# Altium PCB Anchor.PcbDoc
Units mm, origin at the board's own origin, x right, y up, seen from the top; angles counter-clockwise.
Board outline 69.08 x 70.38 mm, 2 copper layers (Top Layer, Bottom Layer); 37 components, 23 nets, 165 pads, 47 vias.
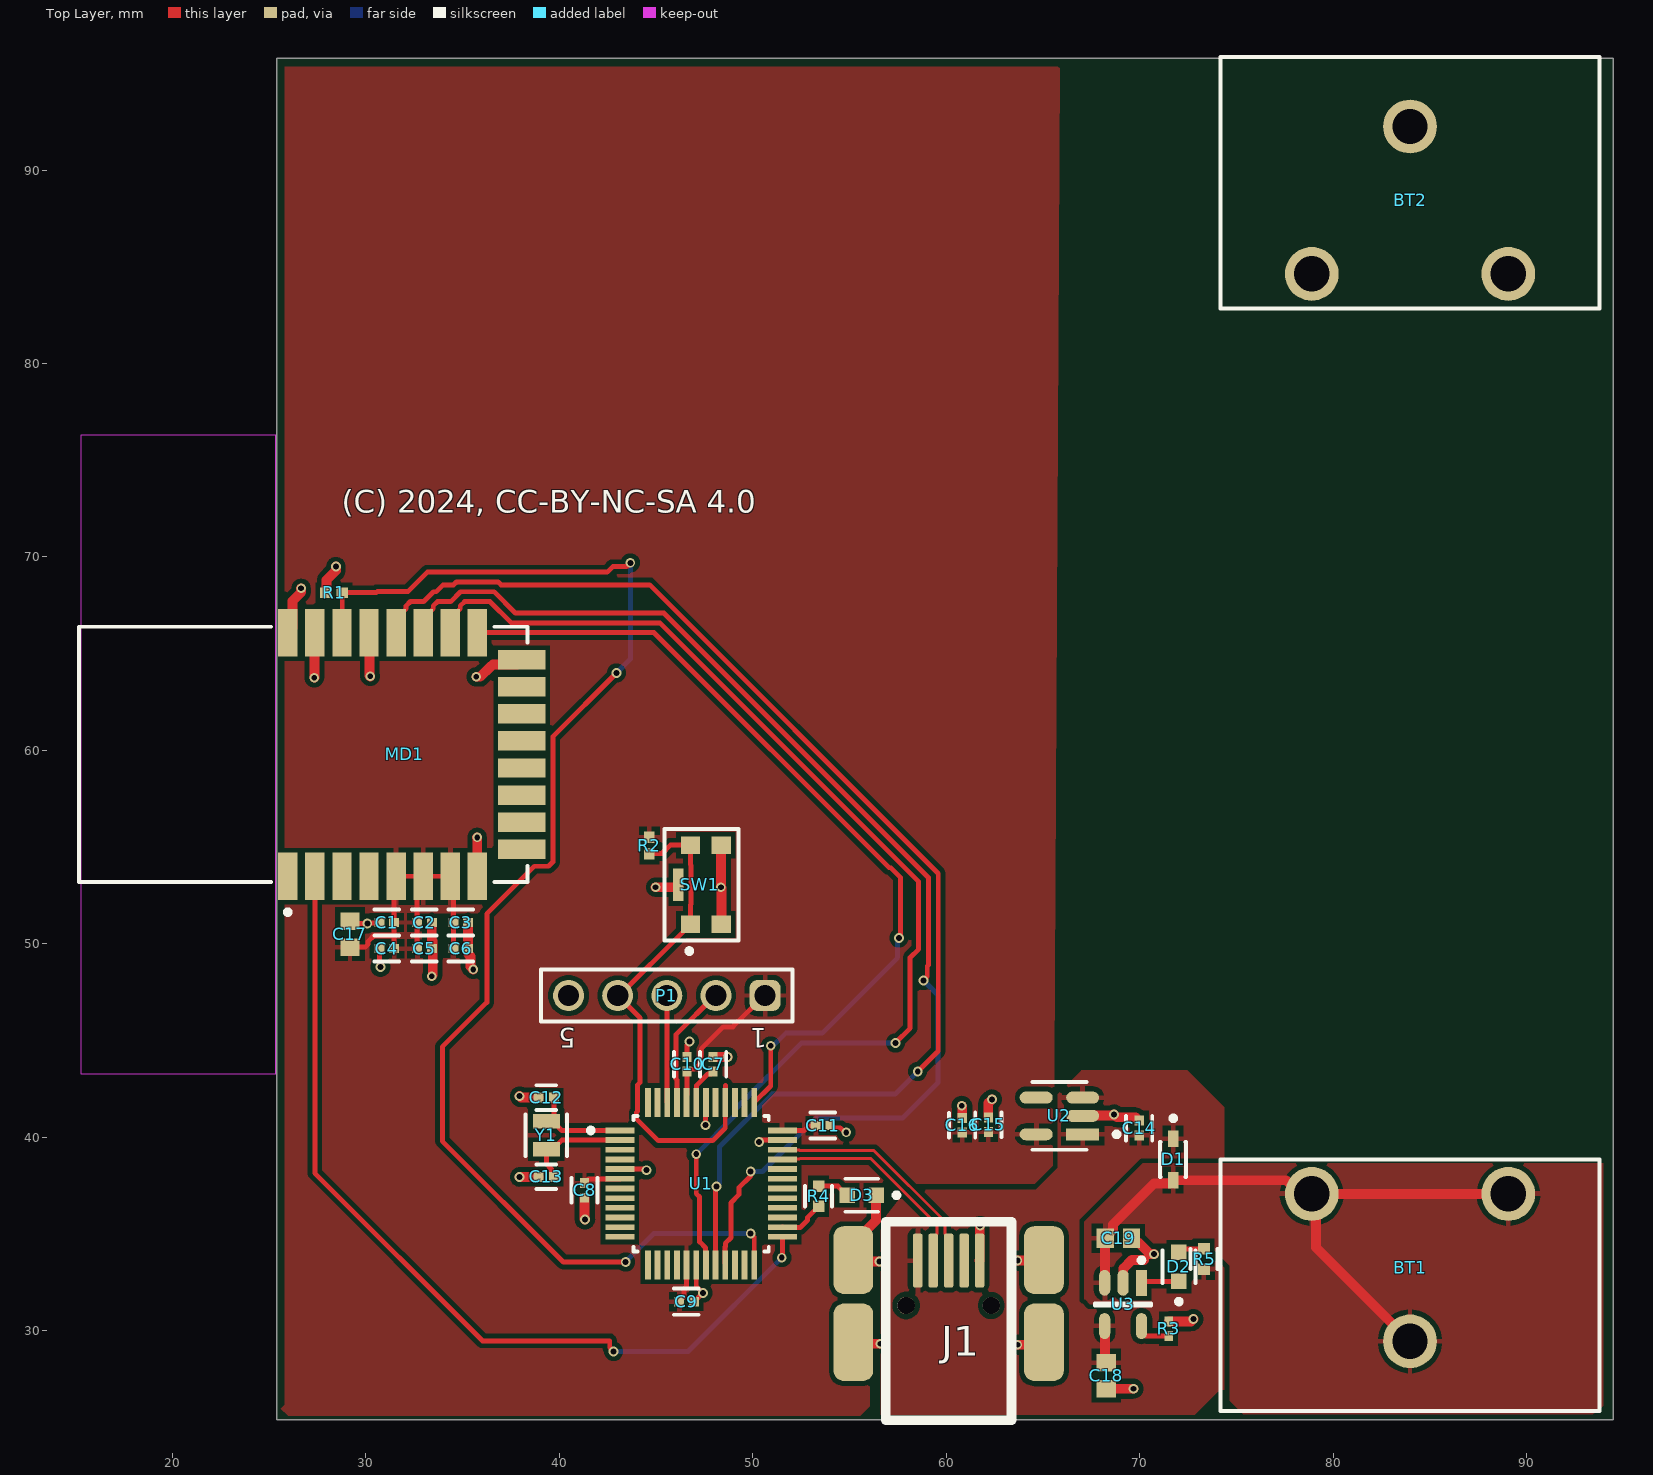
[diagram p0: Top Layer view]
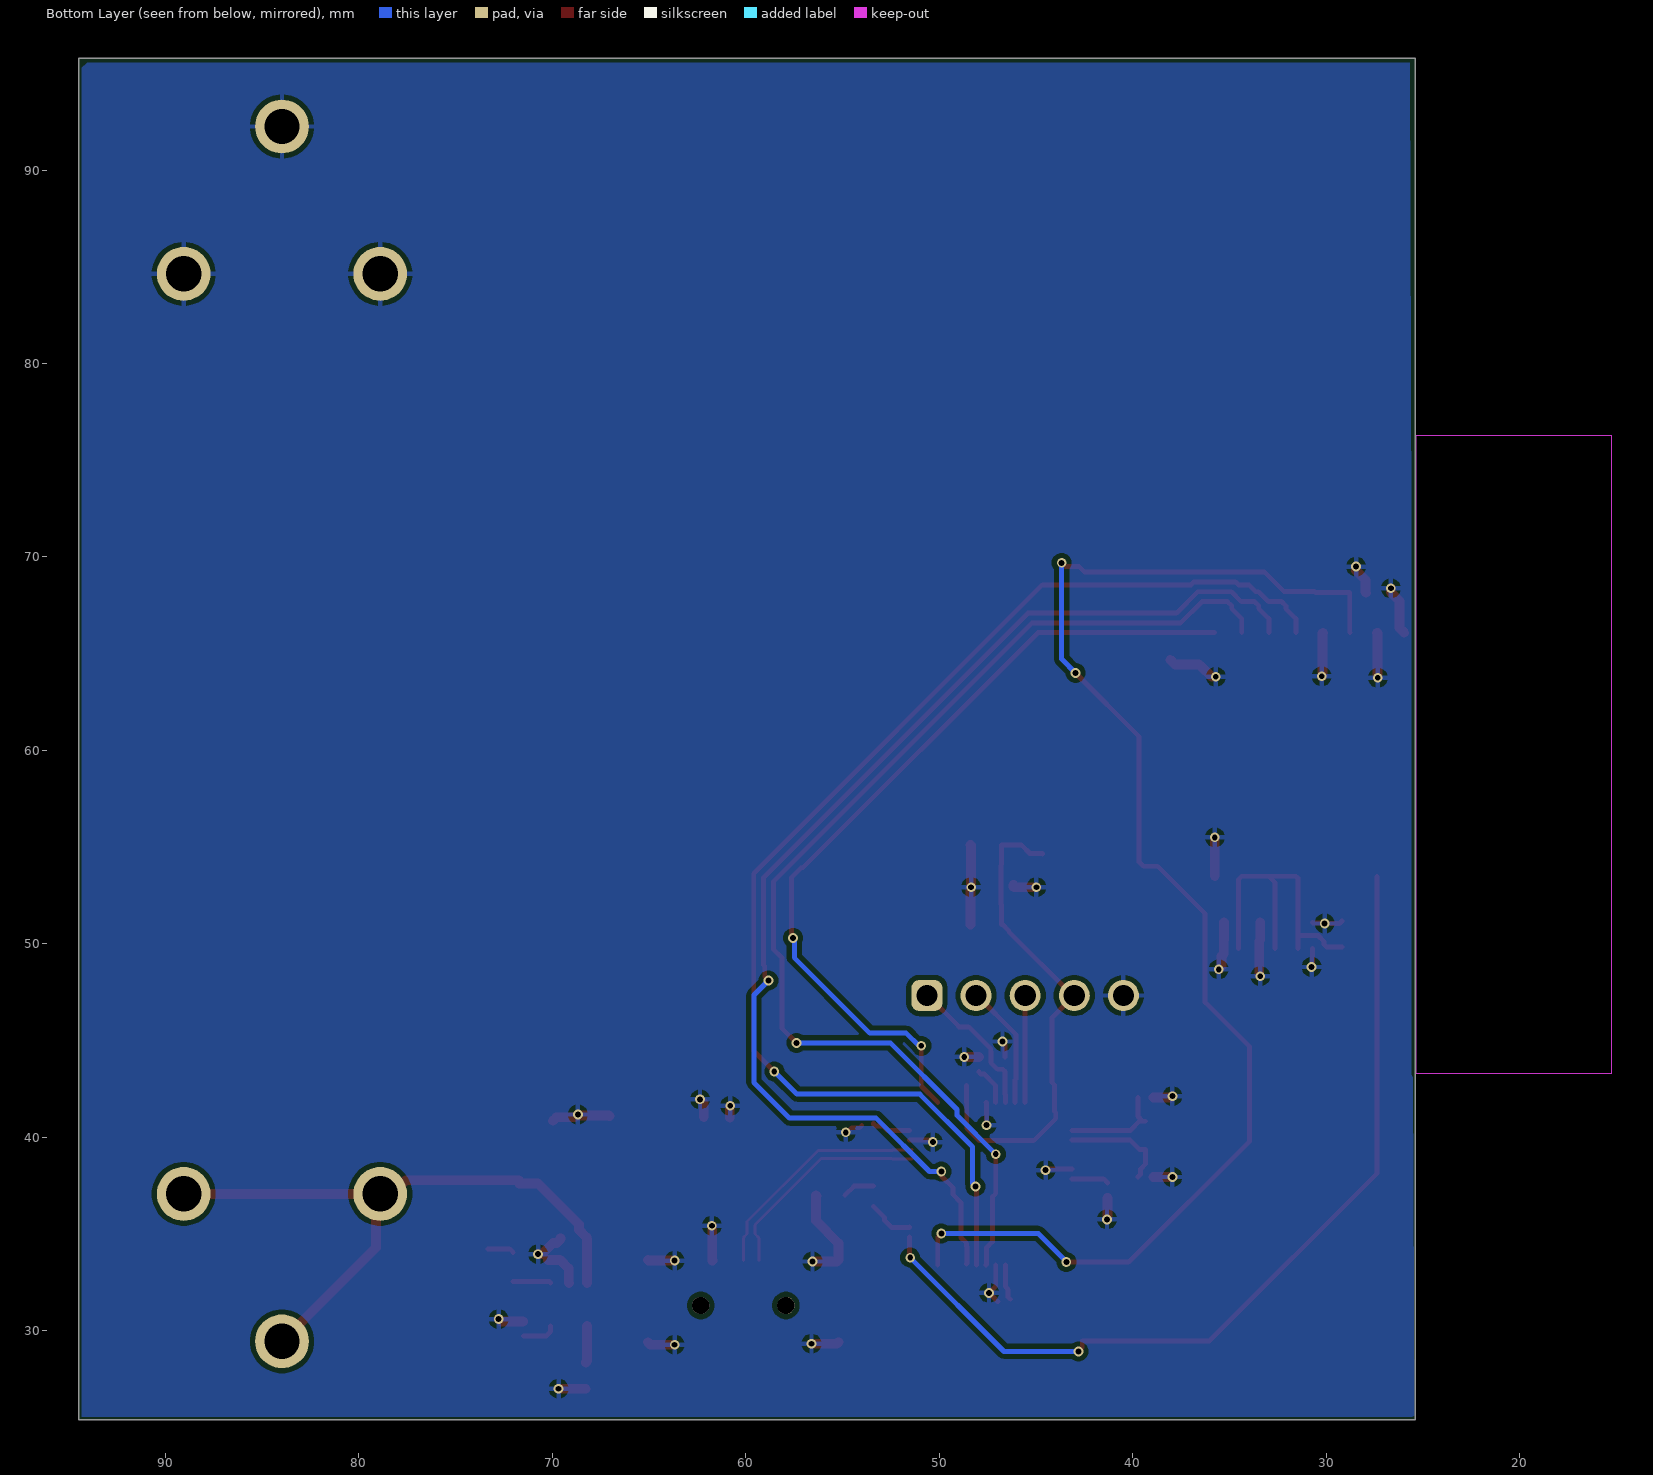
[diagram p1: Bottom Layer view, seen from below]
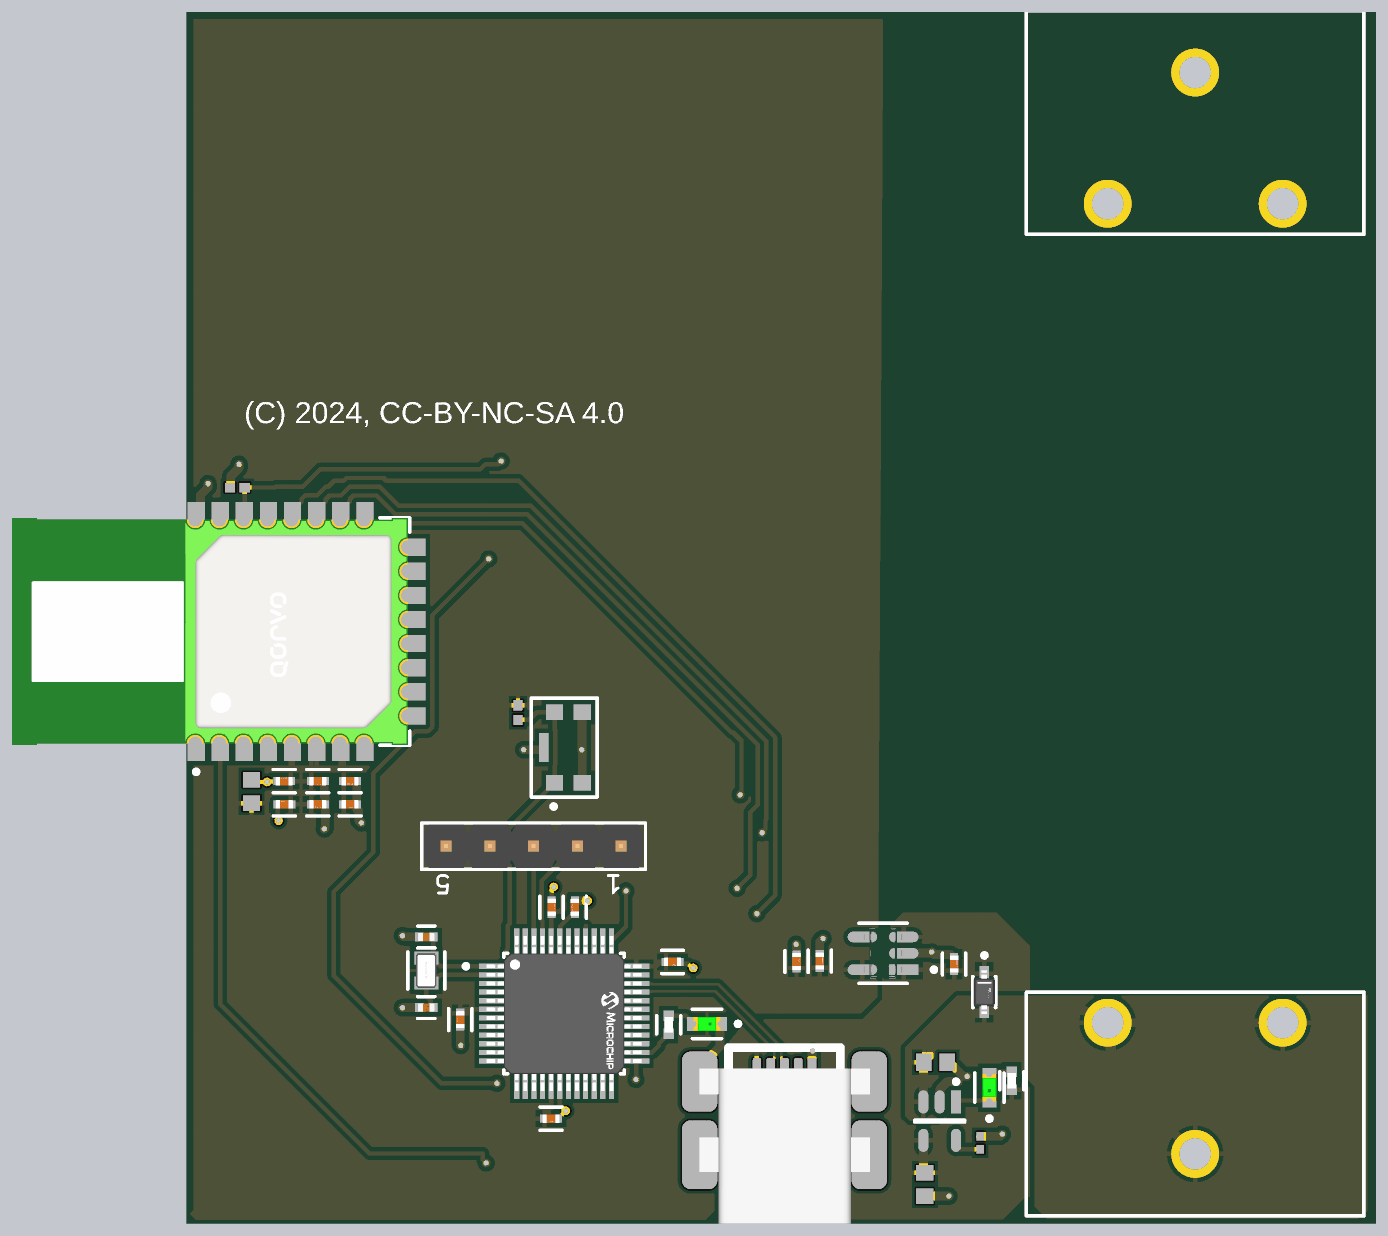
[diagram p2: 3D render of the assembled board from above, using the file's embedded part models]

## Layer stack, top to bottom
Top Solder: solder mask 0.0102, Solder Resist, Dk 3.5
Top Layer: signal copper 0.0356
Dielectric 1: dielectric 0.32, FR-4, Dk 4.8
Bottom Layer: signal copper 0.0356
Bottom Solder: solder mask 0.0102, Solder Resist, Dk 3.5

## Board outline
25.4,25.4 94.475,25.4 94.475,95.775 25.4,95.775

## Design rules (kind name [scope] priority, off if disabled: settings)
Clearance Clearance_1 [OnMid vs OnMid] p1: gap=0.127 ignorepadtopadclearanceinfootprint=FALSE except(0.254: Hole-Hole) sourcerule=36 cellrowname=All cellrowtype=0 cellcolname=All cellcoltype=0 innerlayers=TRUE
Clearance Clearance_2 [(ExistsOnLayer('Top Layer') Or ExistsOnLayer('Bottom Layer')) vs (ExistsOnLayer('Top Layer') Or ExistsOnLayer('Bottom Layer'))] p2: gap=0.127 ignorepadtopadclearanceinfootprint=FALSE except(0.254: Hole-Hole) sourcerule=36 cellrowname=All cellrowtype=0 cellcolname=All cellcoltype=0 outerlayers=TRUE
Clearance [All] p3: gap=0.254 ignorepadtopadclearanceinfootprint=FALSE ismatrix=TRUE
DiffPairsRouting [All] p1: maxlimit=0.254 minlimit=0.254 mostfreqgap=0.254 toplayer_minwidth=0.381 toplayer_maxwidth=0.381 toplayer_prefwidth=0.381 bottomlayer_minwidth=0.381 bottomlayer_maxwidth=0.381 bottomlayer_prefwidth=0.381 maxuncoupledlength=12.7
PolygonConnect [All] p1: connectstyle=Relief reliefconductorwidth=0.254 reliefentries=4 polygonreliefangle="90 Angle" airgapwidth=0.254
RoutingVias [All] p1: holewidth=0.711 width=1.27 viastyle="Through Hole" minholewidth=0.711 minwidth=1.27 maxholewidth=0.711 maxwidth=1.27
SolderMaskExpansion [All] p1: expansion=0.102 istentingtop=FALSE
Width [All] p1: maxlimit=0.254 minlimit=0.254 preferedwidth=0.254
29 further rules are at their usual default settings.

## Classes and differential pairs
differential pair D_D: +D_P -D_N

## Components (designator, comment, footprint, x,y, rotation, side; value= is the part's Value field where it differs from the comment)
BT1 "54" FP-54-MFG 83.975,32.35 r180 top
BT2 "54" FP-54-MFG 83.975,89.35 r0 top
C1 "CL05A105KP5NNNC" FP-CL511-IPC_C 31.075,51.1 r180 top
C2 "GRM155R71E104KE14J" FP-GRM155-0_05-IPC_C 33.025,51.1 r0 top
C3 "CL05A105KP5NNNC" FP-CL511-IPC_C 34.9,51.1 r0 top
C4 "GRM155R71E104KE14J" FP-GRM155-0_05-IPC_C 31.079,49.75 r180 top
C5 "CL05A105KP5NNNC" FP-CL511-IPC_C 33.025,49.75 r0 top
C6 "GRM155R71E104KE14J" FP-GRM155-0_05-IPC_C 34.9,49.75 r0 top
C7 "CL05A105KP5NNNC" FP-CL511-IPC_C 47.95,43.775 r270 top
C8 "GRM155R71E104KE14J" FP-GRM155-0_05-IPC_C 41.3,37.25 r270 top
C9 "GRM155R71E104KE14J" FP-GRM155-0_05-IPC_C 46.569,31.498 r0 top
C10 "GRM155R71E104KE14J" FP-GRM155-0_05-IPC_C 46.6,43.775 r90 top
C11 "GRM155R71E104KE14J" FP-GRM155-0_05-IPC_C 53.625,40.6 r0 top
C12 "C0402C220K5GACTU" FP-C0402-BB-MFG 39.325,42.05 r0 top value="22 pF"
C13 "C0402C220K5GACTU" FP-C0402-BB-MFG 39.325,37.95 r0 top value="22 pF"
C14 "CL05A105KP5NNNC" FP-CL511-IPC_C 69.975,40.475 r90 top
C15 "CL05A105KP5NNNC" FP-CL511-IPC_C 62.175,40.65 r90 top
C16 "GRM155R71E104KE14J" FP-GRM155-0_05-IPC_C 60.825,40.625 r90 top
C17 "C0603C475K8PACTU" CAPC1608X87X35NL15T15 29.175,50.5 r270 top
C18 "C0603C475K8PACTU" CAPC1608X87X35NL15T15 68.275,27.675 r270 top
C19 "C0603C475K8PACTU" CAPC1608X87X35NL15T15 68.9,34.775 r0 top
D1 "BAT20JFILM" FP-BAT20JFILM-MFG 71.725,38.85 r270 top
D2 "LTST-C190GKT" FP-LTST-C190GKT-MFG 72.025,33.3 r90 top
D3 "LTST-C190GKT" FP-LTST-C190GKT-MFG 55.625,37 r180 top
J1 "67503-1020" MOLX-67503-1020_V 58.525,33.625 r90 top
MD1 "DWM1000" FP-DWM1000-MFG 26.759,59.787 r90 top
P1 "61300511121" 61300511121 45.555,47.325 r180 top
R1 "MCMR04X1002FTL" RESC1005X40X25NL05T10 28.35,68.15 r0 top
R2 "MCMR04X1002FTL" RESC1005X40X25NL05T10 44.65,55.075 r90 top
R3 "RC0402JR-074K7L" RESC1005X40X25LL05T10 71.5,30.1 r90 top
R4 "CRCW0402330RFKED" FP-CRCW0402-e3-MFG 53.4,36.95 r270 top
R5 "CRCW0402330RFKED" FP-CRCW0402-e3-MFG 73.325,33.7 r90 top
SW1 "KMR211GLFS" FP-KMR211GLFS-MFG 47.575,53.05 r90 top
U1 "ATSAMD21G18A-AUT" FP-MC-MFG 47.325,37.6 r0 top
U2 "AP2112K-3.3TRG1" FP-SOT25-IPC_A 65.85,41.1 r180 top
U3 "MCP73831T-2DCI/OT" FP-C04-091-OT-IPC_B 69.14,31.356 r270 top
Y1 "ABS06-32.768KHZ-1-T" FP-ABS06-MFG 39.325,40.1 r90 top

## Footprints (in the part's own frame and the unit in brackets; to place one, negate y for a bottom-side part, rotate by r counter-clockwise, add the part's x,y. Pads: shape width x height; smd on the part's side, far side on the other; paste and mask are expansions set on the pad)
61300511121 [mm] "Pin Header, pitch 2.54 mm, THT, Vertical, single row, 5p"
  rrect50% 1.6x1.6 hole 1.1: 1(-5.08,0)
  round 1.6 hole 1.1: 2(-2.54,0) 3(0,0) 4(2.54,0) 5(5.08,0)
  silkscreen extent -6.5,-1.35 6.5,1.35, body extent -6.35,-1.27 6.35,1.27, height 8.57
CAPC1608X87X35NL15T15 [mm] "Chip Capacitor, 2-Leads, Body 1.60x0.80mm, IPC Medium Density"
  rect 0.9x1 smd: 1(-0.675,0) 2(0.675,0)
  body extent -0.87,-0.48 0.87,0.47, height 0.87
FP-54-MFG [mm]
  round 2.78 hole 1.83 paste-2539.97 mask+0: 1(-5.08,-4.72) 1(0,2.9) 1(5.08,-4.72)
  silkscreen extent -9.8,-6.5 9.8,6.5
FP-ABS06-MFG [mm]
  rect 0.75x1.4 smd paste+0 mask+0: 1(-0.725,0) 2(0.725,0)
  silkscreen extent -1.07,-1.07 1.07,1.07, body extent -1.2,-0.8 1.2,0.8, height 0.25
FP-BAT20JFILM-MFG [mm]
  rect 0.86x0.54 smd paste+0 mask+0: 1(-1.07,0) 2(1.07,0)
  silkscreen extent -2.25,-0.67 0.9,0.67, body extent -1.6,-0.77 1.6,0.77, height 0.25
FP-C04-091-OT-IPC_B [mm]
  rect 1.338x0.578 smd paste+0 mask+0: 1(-1.116,0.95)
  rrect100% 1.338x0.578 smd paste+0 mask+0: 2(-1.116,0) 3(-1.116,-0.95) 4(1.116,-0.95) 5(1.116,0.95)
  silkscreen extent -2.41,-1.45 0.05,1.45
FP-C0402-BB-MFG [mm]
  rect 0.52x0.52 smd paste+0 mask+0: 1(-0.4,0) 2(0.4,0)
  silkscreen extent -0.5,-0.64 0.5,0.64, body extent -0.8,-0.4 0.8,0.4, height 0.25
FP-CL511-IPC_C [mm]
  rect 0.515x0.472 smd paste+0 mask+0: 1(-0.379,0) 2(0.379,0)
  silkscreen extent -0.64,-0.67 0.64,0.67, body extent -0.74,-0.38 0.74,0.38, height 0.25
FP-CRCW0402-e3-MFG [mm]
  rect 0.6x0.6 smd paste+0 mask+0: 1(-0.525,0) 2(0.525,0)
  silkscreen extent -0.53,-0.7 0.53,0.7, body extent -0.92,-0.4 0.92,0.4, height 0.25
FP-DWM1000-MFG [mm]
  rect 2.45x1 smd paste+0 mask+0: 1(-6.295,0.8) 2(-6.295,-0.6) 3(-6.295,-2) 4(-6.295,-3.4) 5(-6.295,-4.8) 6(-6.295,-6.2) 7(-6.295,-7.6) 8(-6.295,-9) 17(6.295,-9) 18(6.295,-7.6) 19(6.295,-6.2) 20(6.295,-4.8) 21(6.295,-3.4) 22(6.295,-2) 23(6.295,-0.6) 24(6.295,0.8)
  rect 1x2.45 smd paste+0 mask+0: 9(-4.9,-11.295) 10(-3.5,-11.295) 11(-2.1,-11.295) 12(-0.7,-11.295) 13(0.7,-11.295) 14(2.1,-11.295) 15(3.5,-11.295) 16(4.9,-11.295)
  Keep-Out Layer region: -16.5,1.42 16.5,1.42 16.5,11.495 -16.5,11.495
  Keep-Out Layer region: -16.5,1.42 16.5,1.42 16.5,11.495 -16.5,11.495
  silkscreen extent -8.27,-11.6 6.6,11.6, body extent -7.62,-12.62 7.62,11.7, height 0.25
FP-GRM155-0_05-IPC_C [mm]
  rect 0.515x0.472 smd paste+0 mask+0: 1(-0.379,0) 2(0.379,0)
  silkscreen extent -0.64,-0.67 0.64,0.67, body extent -0.74,-0.38 0.74,0.38, height 0.25
FP-KMR211GLFS-MFG [mm]
  rect 0.9x1 smd paste+0 mask+0: 1(-2.05,0.8) 2(2.05,0.8) 3(-2.05,-0.8) 4(2.05,-0.8)
  rect 1.7x0.55 smd paste+0 mask+0: 5(0,1.425)
  silkscreen extent -3.55,-1.68 2.88,2.15
FP-LTST-C190GKT-MFG [mm]
  rect 0.8x0.8 smd paste+0 mask+0: 1(-0.75,0) 2(0.75,0)
  silkscreen extent -1.92,-0.85 0.85,0.85, body extent -1.25,-0.55 1.25,0.55, height 0.25
FP-MC-MFG [mm]
  rect 1.5x0.3 smd paste+0 mask+0: 1(-4.2,2.75) 2(-4.2,2.25) 3(-4.2,1.75) 4(-4.2,1.25) 5(-4.2,0.75) 6(-4.2,0.25) 7(-4.2,-0.25) 8(-4.2,-0.75) 9(-4.2,-1.25) 10(-4.2,-1.75) 11(-4.2,-2.25) 12(-4.2,-2.75) 25(4.2,-2.75) 26(4.2,-2.25) 27(4.2,-1.75) 28(4.2,-1.25) 29(4.2,-0.75) 30(4.2,-0.25) 31(4.2,0.25) 32(4.2,0.75) 33(4.2,1.25) 34(4.2,1.75) 35(4.2,2.25) 36(4.2,2.75)
  rect 0.3x1.5 smd paste+0 mask+0: 13(-2.75,-4.2) 14(-2.25,-4.2) 15(-1.75,-4.2) 16(-1.25,-4.2) 17(-0.75,-4.2) 18(-0.25,-4.2) 19(0.25,-4.2) 20(0.75,-4.2) 21(1.25,-4.2) 22(1.75,-4.2) 23(2.25,-4.2) 24(2.75,-4.2) 37(2.75,4.2) 38(2.25,4.2) 39(1.75,4.2) 40(1.25,4.2) 41(0.75,4.2) 42(0.25,4.2) 43(-0.25,4.2) 44(-0.75,4.2) 45(-1.25,4.2) 46(-1.75,4.2) 47(-2.25,4.2) 48(-2.75,4.2)
  silkscreen extent -5.82,-3.5 3.5,3.5, body extent -5.05,-5.05 5.05,5.05, height 0.25
FP-SOT25-IPC_A [mm]
  rect 1.707x0.616 smd paste+0 mask+0: 1(-1.201,0.95)
  rrect100% 1.707x0.616 smd paste+0 mask+0: 2(-1.201,0) 3(-1.201,-0.95) 4(1.201,-0.95) 5(1.201,0.95)
  silkscreen extent -3.08,-1.75 1.4,1.75, body extent -2.55,-2 2.55,2, height 0.25
MOLX-67503-1020_V [mm] "Mini USB Connector, SMT, Righer Angle"
  rrect50% 2.8x0.5 smd: 1(0,0) 2(0,-0.8) 3(0,-1.6) 4(0,-2.4) 5(0,-3.2)
  rrect50% 3.5x2.05 smd: 6(0.025,3.325) 8(0.025,-6.525)
  rrect50% 4x2.05 smd: 7(-4.225,3.325) 9(-4.225,-6.525)
  round 0.9 hole 0.9 unplated: X(-2.325,-3.8) Y(-2.325,0.6)
  silkscreen extent -8.25,-4.85 2,1.65, body extent -8.22,-6.56 0.78,3.34, height 3.95
RESC1005X40X25LL05T10 [mm] "Chip Resistor, 2-Leads, Body 1.00x0.50mm, IPC High Density"
  rect 0.5x0.45 smd: 1(-0.375,0) 2(0.375,0)
  body extent -0.53,-0.27 0.53,0.28, height 0.4
RESC1005X40X25NL05T10 [mm] "Chip Resistor, 2-Leads, Body 1.00x0.50mm, IPC Medium Density"
  rect 0.6x0.55 smd: 1(-0.425,0) 2(0.425,0)
  body extent -0.53,-0.27 0.53,0.28, height 0.4

## Part data
BT1 BT2: library part CMP-19636-000013-1, "BATTERY CONTACT CLP 18650 PC PIN", Lead Free="Lead Free"
C1 C3 C5 C7 C14 C15: library part CMP-13271-001936-1, "Cap Ceramic 1uF 10V X5R ±10% SMD 0402 +85°C Paper T/R", Capacitance=1uF, Case Code (Imperial)=0402, Case Code (Metric)=1005, Dielectric=X5R, Max Operating Temperature=85°C, Min Operating Temperature=-55°C, Package Quantity=1, Tolerance=10%, Voltage Rating=10V, Case/Package=0402, Contact Plating=Tin, Depth=0.5mm, Height=0.5mm, Length=1mm, Material=Ceramic, Mount="Surface Mount", Packaging="Tape and Reel", Radiation Hardening=No, Thickness=0.022inch, Width=0.02inch
C2 C4 C6 C8 C9 C10 C11 C16: library part CMP-06035-003995-1, "Chip Multilayer Ceramic Capacitors for General Purpose, 0402, 0.10uF, X7R, 15%, 10%, 25V", Capacitance=100nF, Case Code (Imperial)=0402, Case Code (Metric)=1005, Dielectric=X7R, Max Operating Temperature=125°C, Min Operating Temperature=-55°C, Package Quantity=50000, Resistor Type=Ceramic, Tolerance=10%, Voltage Rating=25V, Case/Package=0402, Height=0.5mm, Length=0.039inch, Mount="Surface Mount", Packaging="Tape and Reel", Termination=SMD/SMT, Thickness=0.022inch, Voltage Rating (DC)=25V, Weight=0.000212oz, Width=0.5mm
C12 C13: library part CMP-2008-03341-2, "CAP CER 22PF 50V 10% NP0 0402", Capacitance="22 pF", Manufacturer=Kemet, Package=C0402-BB, Temperature="-55°C to +125°C", Temperature Characteristic=C0G, Temperature Coefficient=15%, Temperature Range High=+125°C, Temperature Range Low=-55°C, Tolerance=0.1, Voltage Rating="50 V", Automotive=No, Category=Cap, ComponentLink2Description=Datasheet, ComponentLink2URL=https://content.kemet.com/datasheets/KEM_C1002_X7R_SMD.pdf, Device Class L1="Passive Components", Device Class L2=Capacitors, Device Class L3="Ceramic Capacitors", Digikey Description="CAP CER 22PF 50V 10% NP0 0402", Height=0.55mm, Ipc Land Pattern Name=CAPC10050X50, Lead Free=Yes, Manufacturer Part Number=C0402C220K5GACTU, Material=Ceramic, Mouser Description="Multilayer Ceramic Capacitors MLCC - SMD/SMT 50volts 22pF C0G 10%", Octopart=https://octopart.com/c0402c220k5gactu-kemet-9144192, RoHS=TRUE
C17 C18 C19: library part CMP-2006-03238-1, Manufacturer=Kemet, Part Number=C0603C475K8PACTU
D1: library part CMP-12187-000030-1, "DIODE SCHOTTKY 23V 1A SOD323", Average Rectified Current=1A, Capacitance=30pF, Forward Voltage=620mV, Max Forward Surge Current (Ifsm)=5A, Max Operating Temperature=150°C, Max Repetitive Reverse Voltage (Vrrm)=23V, Max Reverse Leakage Current=12uA, Min Operating Temperature=-65°C, Package Quantity=1, Current Rating=1A, Element Configuration=Single, Forward Current=1A, Height=1.03mm, Lead Free="Lead Free", Length=1.8mm, Max Reverse Voltage (DC)=23V, Max Surge Current=5A, Mount="Surface Mount", Number of Pins=2, Output Current=1A, Packaging="Tape and Reel", Peak Non-Repetitive Surge Current=5A, Peak Reverse Current=12uA, Polarity=Standard, Radiation Hardening=No, REACH SVHC="No SVHC", Voltage Rating (DC)=23V, Weight=0.01lb, Width=1.35mm
D2 D3: library part CMP-22017-000005-2, "LED GREEN CLEAR CHIP SMD", Case Code (Imperial)=0603, Case Code (Metric)=1608, Color=Green, Forward Current=30mA, Forward Voltage=2.1V, Lens Color=Colorless, Max Operating Temperature=85°C, Min Operating Temperature=-55°C, Package Quantity=1, Power Dissipation=100mW, Reverse Voltage=5V, Test Current=10mA, Voltage=2V, Case/Package=0603, Depth=0.8mm, Dominant Wavelength=569nm, Height=0.8mm, Illumination Color=Green, Lead Free="Lead Free", Length=1.6mm, Lens Style=Clear, Lens Transparency=Clear, Luminous Intensity=6mcd, Mount="Surface Mount", Number of Elements=1, Number of LEDs=1, Number of Pins=2, Packaging="Tape and Reel", Power Rating=100mW, Radiation Hardening=No, Viewing Angle=130°, Wavelength=565nm, Width=0.8mm
J1: library part CMP-0411-00002-1, "USB, MINI, SMD, RA KME04-USBMU03A01", Manufacturer=Molex, ComponentLink1Description="Manufacturer URL", ComponentLink1URL=http://www.molex.com/, ComponentLink2Description=Datasheet, ComponentLink2URL=http://www.molex.com/pdm_docs/sd/675031020_sd.pdf, DatasheetVersion="Rev F, 06/2009", Mounting Technology="Surface Mount", PackageDescription="Mini USB Connector, SMT, Righer Angle", PackageReference=67503-1020, PartNumber=67503-1020, Terminal Pitch="0.8 mm"
MD1: library part CMP-231853-000001-1, "RX TXRX MODULE 802.15.4 CHIP SMD"
P1: library part CMP-1502-01068-2, Color=Black, Contact Resistance=20mΩ, Current Rating=3A, Max Operating Temperature=105°C, Min Operating Temperature=-40°C, Operating Supply Voltage=250V, Connector Type="Male Pin", Contact Material=Copper, Contact Mating Length=5.9944mm, Contact Plating=Gold, Gender=Male, Height=8.89mm, Lead Free="Lead Free", Lead Pitch=2.54mm, Mount="Through Hole", NexarPartId=32855526, Number of Contacts=5, Number of Pins=5, Number of Positions=5, Number of Rows=1, Orientation=Vertical, Packaging=Bulk, Pitch=2.54mm, REACH SVHC=Unknown, RoHS=Compliant, Termination=Solder, Voltage Rating=250V
R1 R2: library part CMP-2002-06479-1, Manufacturer=Multicomp, Part Number=MCMR04X1002FTL
R3: library part CMP-2002-08011-1, Manufacturer="Yageo / Phycomp", Part Number=RC0402JR-074K7L
R4 R5: library part CMP-2002-08523-2, "RES Thick Film, 330Ω, 1%, 0.063W, 100ppm/°C, 0402", Case Code (Imperial)=0402, Case Code (Metric)=1005, Max Operating Temperature=155°C, Max Power Dissipation=63mW, Min Operating Temperature=-55°C, Package Quantity=10, Resistance=330R, Temperature Coefficient=100ppm/°C, Tolerance=1%, Voltage Rating=50V, Case/Package=0402, Composition="Thick Film", Contact Plating=Tin, Depth=0.5mm, Features="Automotive AEC-Q200", Height=0.35mm, Lead Free="Lead Free", Length=1mm, Military Standard=Not, Number of Terminations=2, Packaging="Tape and Reel", Power Rating=63mW, Radiation Hardening=No, Termination=SMD/SMT, Voltage Rating (DC)=50V, Weight=2.3E-05oz, Width=0.5mm
SW1: library part CMP-10040-000023-1, "SWITCH TACTILE SPST-NO 0.05A 32V", Contact Current Rating=50mA, Max Operating Temperature=85°C, Max Voltage Rating (DC)=32V, Min Operating Temperature=-40°C, Operating Force=1.2N, Package Quantity=1, Power Rating=1W, Actuator Length=0.5mm, Actuator Type=Standard, Contact Material=Silver, Contact Plating=Silver, Current Rating=50mA, Depth=4.6mm, Illumination Type=Non-Illuminated, Lead Free="Lead Free", Length=2.8mm, Max Current Rating=50mA, Mechanical Life=200000Cycles, Mount="Surface Mount", Orientation=Straight, Packaging="Tape and Reel", Radiation Hardening=No, REACH SVHC="No SVHC", Switch Function=Off-Mom, Switch Travel=0.2mm, Termination="Gull Wing", Throw Configuration=SPST, Voltage Rating (DC)=32V, Width=2.8mm
U1: library part CMP-06276-000066-1, "IC MCU 32BIT 256KB FLASH 48TQFP", Case/Package=TQFP, Frequency=48MHz, Max Operating Temperature=85°C, Min Operating Temperature=-40°C, Core Architecture=ARM, Interface=I2C, Memory Size=256KB, Memory Type=FLASH, Number of I/Os=38, Number of Pins=48, Oscillator Type=Internal, Packaging="Cut Tape", Peripherals="Brown-out Detect/Reset"
U2: library part CMP-12756-000035-1, "IC REG LINEAR 3.3V 600MA SOT25", Case/Package=SOT-23-5, Dropout Voltage=250mV, Max Input Voltage=6V, Max Operating Temperature=85°C, Max Output Current=600mA, Min Input Voltage=2.5V, Min Operating Temperature=-40°C, Output Voltage=3.3V, Package Quantity=1, Quiescent Current=55uA, Accuracy=1.5%, Height=1.3mm, Lead Free="Lead Free", Length=3.1mm, Mount="Surface Mount", Number of Outputs=1, Number of Pins=5, Number of Regulators=1, Output Current=600mA, Output Type=Fixed, Packaging="Tape and Reel", Polarity=Positive, Width=1.7mm
U3: library part CMP-0133-00146-2, "IC CONTROLLR LI-ION 4.2V SOT23-5", Case/Package=SOT-23, Max Charge Current=500mA, Max Input Voltage=3.75V, Max Operating Temperature=85°C, Max Output Voltage=4.232V, Max Supply Voltage=6V, Min Operating Temperature=-40°C, Min Output Voltage=4.168V, Operating Supply Current=510uA, Output Voltage=4.2V, Package Quantity=3000, Contact Plating=Tin, Height=1.3mm, Lead Free="Lead Free", Length=3.1mm, Max Output Current=500mA, Min Supply Voltage=3.75V, Mount="Surface Mount", Number of Cells=1, Number of Channels=1, Number of Pins=5, Output Current=500mA, Packaging="Tape and Reel", Radiation Hardening=No, REACH SVHC="No SVHC", Width=1.8mm
Y1: library part CMP-27762-012387-2, "CRYSTAL 32.7680KHZ 12.5PF SMD", Case/Package=CSMD, ESR (Equivalent Series Resistance)=90kR, Frequency=32.768kHz, Frequency Tolerance=10ppm, Load Capacitance=12.5pF, Max Operating Temperature=85°C, Min Operating Temperature=-40°C, Operating Frequency="32.768 kHz", Package Quantity=3000, Depth=1.2mm, Height=0.6mm, Lead Free="Lead Free", Length=2mm, Mount="Surface Mount", Number of Pins=2, Packaging="Tape and Reel", Radiation Hardening=No, REACH SVHC="No SVHC", RoHS Compliant=Yes, Series=ABS06, Series Resistance=90kR, Termination=SMD/SMT, Tolerance=10ppm, Width=1.2mm

## Via types
v1: diameter 0.5, hole 0.3, Top Layer to Bottom Layer, tented both sides, 38 vias
v2: diameter 0.5, hole 0.3, Top Layer to Bottom Layer, 9 vias

## Nets (pads, with @x,y where several pads share a name; then routed paths per layer and width w, separated by ;. In a path a pad name is that pad's centre, name@x,y a point inside that pad or via, vN(x,y) a via of type N, cw(c..) or ccw(c..) an arc to the next point about the centre after c; other vN are vias at no path point)
3V3: C1.1 C2.1 C3.1 C4.1 C5.1 C6.1 C8.1 C9.1 C10.1 C11.1 C15.1 C16.1 C17.2 MD1.5 MD1.6 MD1.7 P1.1 R2.2 U1.6 U1.17 U1.36 U1.44 U2.5 | length 30.4
  Top Layer w0.254: C17.2 29.963,49.825 30.112,49.974 30.112,50.123 30.414,50.425 31.457,50.425 ; C4.1 31.457,50.425 ; C5.1 C2.1 32.646,53.179 MD1.6 ; C6.1 C3.1 34.521,53.33 MD1.7 MD1.6 ; C8.1 41.3,37.65 41.5,37.85 U1.6 ; C9.1@46.318,31.625 46.327,31.625 46.436,31.734 46.436,32.13 46.575,32.269 U1.17 ; U1.44 46.575,42.2 46.587,42.213 46.587,43.384 C10.1 46.6,43.406 46.709,43.515 46.994,43.515 47.333,43.854 47.333,43.873 47.315,43.891 47.315,44.417 47.333,44.434 47.333,44.569 48.471,45.707 48.967,45.707 P1.1@50.61,47.35 ; U1.36 52.656,40.35 52.879,40.573 53.291,40.573 53.4,40.682 C11.1@53.4,40.704 ; 31.457,50.425 31.457,53.39 MD1.5 MD1.6
CS: MD1.17 U1.37 | length 43
  Top Layer w0.254: MD1.17 44.893,66.082 57.044,53.931 57.133,53.931 57.626,53.438 v1@57.626,50.3 ; U1.37 50.925,42.65 v1(50.925,44.725)
  Bottom Layer w0.254: v1(50.925,44.725) 51.046,44.725 51.704,45.383 53.583,45.383 57.484,49.284 57.484,50.231 v1(57.553,50.3)
D_N: J1.2 U1.33 | length 11.5
  Top Layer w0.152: U1.33@51.4,38.87 52.412,38.87 52.439,38.897 56.097,38.897 59.522,35.472 59.522,34.998 59.325,34.801 J1.2
D_P: J1.3 U1.34 | length 12.2
  Top Layer w0.152: U1.34@51.4,39.37 51.44,39.33 52.412,39.33 52.439,39.303 56.265,39.303 59.928,35.64 59.928,34.998 60.125,34.801 J1.3
GND: BT2.1 C1.2 C2.2 C3.2 C4.2 C5.2 C6.2 C7.1 C8.2 C9.2 C10.2 C11.2 C12.1 C13.1 C14.2 C15.2 C16.2 C17.1 C18.2 C19.2 D3.1 J1.5 J1.6 J1.7 J1.8 J1.9 MD1.8 MD1.16 MD1.21 MD1.23 MD1.24 P1.5 R1.1 R3.2 SW1.3 SW1.4 SW1.5 U1.5 U1.18 U1.35 U1.42 U2.2 U3.2 | length 61.1
  Top Layer w0.254: C17.1 29.3,51.05 v2(30.075,51.05) 30.1,51.075 30.671,51.075 C1.2 ; C4.2 30.7,48.85 v2(30.75,48.8) ; U1.5 44.45,38.35 v2(44.5,38.3) ; C10.2 46.6,44.758 46.725,44.883 v2(46.725,44.95) ; C9.2 46.969,31.498 47.421,31.95 v2(47.425,31.95) 47.075,32.3 U1.18 ; C9.2@47.075,31.625 C9.2@47.175,31.725 ; v2(47.55,40.625) 47.562,40.637 47.562,41.788 U1.42 ; v2(50.325,39.75) 50.425,39.85 U1.35 ; C11.2 54.113,40.491 54.518,40.491 54.758,40.25 v2(54.825,40.25)
  Top Layer w0.508: MD1.24 26.205,66.328 26.205,67.724 26.65,68.169 v1(26.65,68.375) ; v1(27.325,63.75) 27.342,63.767 27.342,66.065 MD1.23 ; R1.1 27.946,68.15 27.967,68.171 27.967,68.811 28.45,69.294 v1(28.45,69.5) ; MD1.21 30.192,66.049 30.192,63.858 v1(30.225,63.825) ; v1(33.4,48.325) 33.45,48.375 33.45,50.159 33.404,50.205 C2.2 ; C3.2 35.279,50.205 35.287,50.197 35.287,49.475 35.404,49.358 35.404,48.821 v1(35.55,48.675) ; v1(35.7,63.8) 35.906,63.8 36.455,64.349 36.469,64.349 36.561,64.441 37.808,64.441 MD1.16 ; v1(35.75,55.5) 35.755,55.495 35.755,53.496 MD1.8 ; v1(37.941,37.944) 37.944,37.947 38.922,37.947 C13.1 ; v1(37.941,42.125) 38.01,42.056 38.919,42.056 C12.1 ; C8.2 41.3,35.775 v1(41.325,35.75) ; v1(44.975,52.925) 46.129,52.925 46.15,52.946 SW1.5 ; C7.1@47.954,44.157 C7.1 48.696,44.154 v2(48.7,44.15) ; SW1.3 48.375,52.9 v1(48.35,52.925) 48.362,52.937 48.362,55.087 SW1.4 ; J1.7 55.275,29.325 v1(56.6,29.325) ; D3.1@56.325,36.95 D3.1 56.375,35.69 55.2,34.515 J1.6 55.275,33.575 v1(56.55,33.575) ; v1(60.8,41.625) 60.829,41.596 C16.2@60.829,41.007 ; J1.5 61.729,33.629 61.729,35.404 v1(61.75,35.425) ; C15.2@62.175,41.032 62.175,41.769 v1(62.363,41.956) ; v1(63.675,29.275) 64.925,29.275 J1.9 ; v1(63.675,33.625) 65.025,33.625 J1.8 ; U2.2 67.071,41.121 68.621,41.121 v1(68.675,41.175) 68.821,41.029 69.785,41.029 69.961,40.854 C14.2 ; C18.2 v1(69.675,27) ; U3.2 69.153,32.486 69.153,33.212 69.591,33.649 70.224,33.649 ; C19.2 69.575,34.725 69.771,34.529 69.956,34.529 70.53,33.956 v1(70.736,33.956) ; R3.2 72.65,30.475 v1(72.775,30.6)
IRQ: MD1.22 R1.2 U1.24 | length 72.8
  Top Layer w0.254: MD1.22 28.775,66.098 R1.2 30.532,68.15 30.583,68.201 32.167,68.201 33.179,69.212 42.475,69.212 42.758,69.495 43.477,69.495 v1(43.671,69.689) ; v1(42.95,64) 39.66,60.71 39.66,54.229 39.437,54.006 38.706,54.006 36.25,51.55 36.25,46.975 33.95,44.675 33.95,39.8 40.2,33.55 v1(43.425,33.55) ; v1(49.886,35.024) 50.075,34.836 U1.24
  Bottom Layer w0.254: v1(42.95,64) 43.671,64.721 v1(43.671,69.689) ; v1(43.425,33.55) 43.425,33.575 44.874,35.024 v1(49.886,35.024)
MISO: MD1.19 U1.21 | length 61.6
  Top Layer w0.254: MD1.19 32.959,66.807 33.478,67.326 33.478,67.465 33.701,67.688 34.383,67.688 34.891,68.196 36.627,68.196 37.725,67.098 45.403,67.098 59.077,53.424 59.077,48.9 59.019,48.843 59.019,48.294 v1(58.825,48.1) ; 48.555,34.339 48.555,33.49 U1.21@48.595,33.45 ; 48.583,34.339 48.583,34.519 48.87,34.807 48.87,36.614 49.281,37.024 49.281,37.393 49.886,37.998 v1(49.886,38.225)
  Bottom Layer w0.254: v1(49.886,38.225) 50.5,38.225 53.26,40.985 57.735,40.985 59.575,42.825 59.575,47.35 v1(58.825,48.1)
MOSI: MD1.18 U1.19 | length 59
  Top Layer w0.254: MD1.18 34.359,66.807 34.878,67.326 34.878,67.465 35.101,67.688 36.417,67.688 37.515,66.59 45.192,66.59 58.569,53.214 58.569,49.726 58.134,49.292 58.134,45.634 v1(57.375,44.875) ; v1(47.075,39.125) 47.075,37.085 47.25,36.91 47.25,34.592 47.555,34.287 47.555,33.42 U1.19
  Bottom Layer w0.254: v1(47.075,39.125) 49.08,41.13 49.08,41.43 52.525,44.875 v1(57.375,44.875)
NetC7_2: C7.2 U1.43 | length 2.1
  Top Layer w0.254: U1.43 47.095,41.82 47.095,42.687 47.674,43.266 47.841,43.266 47.95,43.375 C7.2
NetC12_2: C12.2 U1.1 Y1.2 | length 5.3
  Top Layer w0.254: Y1.2 Y1.2@39.477,40.825 ; C12.2 39.725,41.073 Y1.2@39.477,40.825 ; U1.1 40.125,40.35 39.65,40.825 Y1.2@39.477,40.825
NetC13_2: C13.2 U1.2 Y1.1 | length 5.6
  Top Layer w0.254: C13.2 39.592,38.083 39.592,38.352 39.325,38.619 Y1.1 39.65,39.375 40.125,39.85 U1.2
NetD2_1: D2.1 U3.1 | length 2
  Top Layer w0.254: U3.1 70.168,32.55 D2.1
NetD2_2: D2.2 R5.2 | length 1.4
  Top Layer w0.254: D2.2 72.2,34.225 R5.2
NetD3_2: D3.2 R4.1 | length 1.7
  Top Layer w0.254: R4.1 54.4,37.475 D3.2
NetR3_1: R3.1 U3.5 | length 1.8
  Top Layer w0.254: U3.5 70.09,29.947 70.312,29.725 R3.1
NetR4_2: R4.2 U1.26 | length 2.4
  Top Layer w0.254: U1.26 51.545,35.33 52.444,35.33 52.836,35.722 52.836,35.861 R4.2
RSTn: P1.4 R2.1 SW1.1 SW1.2 U1.40 | length 26.2
  Top Layer w0.254: R2.1 44.665,54.666 45.306,54.666 45.74,55.1 SW1.2 46.775,54.089 46.806,54.058 46.806,52.042 46.775,52.011 SW1.1 46.725,51 46.402,50.677 46.402,50.627 43.1,47.325 P1.4 44.175,46.165 44.175,42.839 44.044,42.708 44.044,41.342 43.974,41.272 43.974,40.962 45.111,39.825 47.539,39.825 47.925,39.825 48.575,40.475 U1.40 48.595,41.82 48.595,42.687
SCK: MD1.20 U1.20 | length 64.6
  Top Layer w0.254: MD1.20 31.559,66.807 32.078,67.326 32.078,67.465 32.306,67.693 32.988,67.693 33.491,68.196 33.634,68.196 33.99,68.552 34.528,68.552 34.68,68.704 36.838,68.704 36.99,68.552 44.667,68.552 59.585,53.635 59.585,44.46 v1(58.525,43.4) ; U1.20 48.075,37.399 v1(48.126,37.45)
  Bottom Layer w0.254: v1(48.126,37.45) 48.269,37.594 48.269,39.494 51,42.225 57.35,42.225 v1(58.525,43.4)
SWDCLK: P1.2 U1.45 | length 6.4
  Top Layer w0.254: U1.45 46.075,42.961 46.034,43.002 46.034,45.314 P1.2@48.07,47.35
SWDIO: P1.3 U1.46 | length 5.6
  Top Layer w0.254: P1.3@45.53,47.35 P1.3 45.555,41.82 U1.46
Vbat: BT1.1 C19.1 D1.2 U3.3 | length 34.7
  Top Layer w0.508: U3.3 68.203,32.486 68.203,34.753 C19.1 68.225,34.825 68.617,35.217 68.617,35.485 70.736,37.604 71.709,37.604 71.725,37.62 D1.2 77.57,37.78 78.28,37.07 BT1.1@78.895,37.07 ; BT1.1@83.975,29.45 79.122,34.303 79.122,36.843 BT1.1@78.895,37.07 ; BT1.1@89.055,37.07 BT1.1@78.895,37.07
Vbus: C14.1 C18.1 D1.1 J1.1 R5.1 U2.1 U2.3 U3.4 | length 1.9
  Top Layer w0.508: U3.4 68.203,30.226 68.203,28.422 C18.1
WAKE: MD1.2 U1.25 | length 46.6
  Top Layer w0.254: MD1.2 27.359,38.141 36.025,29.475 42.6,29.475 42.606,29.469 42.606,29.119 v1(42.8,28.925) ; v1@51.525,33.775 U1.25
  Bottom Layer w0.254: v1(42.8,28.925) 46.65,28.925 v1(51.5,33.775)
pads on no net: J1.4 J1.X J1.Y MD1.1 MD1.3 MD1.4 MD1.9 MD1.10 MD1.11 MD1.12 MD1.13 MD1.14 MD1.15 U1.3 U1.4 U1.7 U1.8 U1.9 U1.10 U1.11 U1.12 U1.13 U1.14 U1.15 U1.16 U1.22 U1.23 U1.27 U1.28 U1.29 U1.30 U1.31 U1.32 U1.38 U1.39 U1.41 U1.47 U1.48 U2.4

## Polygon pours and split planes (outlines as drawn)
3V3 on Top Layer "3V3_L01_P003" (solid, remove dead copper, pour order 3): 65.575,43.7 65.575,38.55 64.625,37.6 57.925,37.6 56.05,35.725 56.05,26.1 55.55,25.6 25.975,25.6 25.6,25.975 25.8,26.175 25.8,95.35 65.861,95.35
Vbus on Top Layer "VBUS_L01_P002" (solid, pour order 2): 56.7,35.7 56.625,35.625 56.625,25.65 72.85,25.65 74.15,26.95 74.375,26.95 74.375,41.55 72.45,43.475 66.975,43.475 66.975,43.425 65.775,42.225 65.775,38.425 64.625,37.275 57.95,37.275
Vbat on Top Layer "VBAT_L01_P000" (solid, pour order 0): 93.75,25.9 93.975,26.125 93.975,38.65 70.15,38.65 67.125,35.625 67.125,31.625 67.175,31.625 67.425,31.375 69.075,31.375 69.771,32.071 69.771,34.529 73.471,34.529 74.65,33.35 74.65,26.375 75.35,25.675 93.425,25.675
GND on Bottom Layer "GND_L02_P001" (solid, pour order 1): 25.45,25.425 25.575,25.55 94.325,25.55 94.325,95.275 94.05,95.55 25.675,95.55

## Silkscreen, mask and mechanical layers (free items; w line width, h text height)
Top Overlay:
  text "(C) 2024, CC-BY-NC-SA 4.0" at 28.744,71.891 h2

## Text inside footprints (layer, text, board x,y; h text height)
P1: Top Overlay "1" at 50.755,45.625 h1.02 r180; Top Overlay "5" at 40.855,45.625 h1.02 r180